# Altium PCB PCB2.PcbDoc
Units mil, origin at the board's own origin, x right, y up, seen from the top; angles counter-clockwise.
Board outline 1340 x 1665 mil, 2 copper layers (Top Layer, Bottom Layer); 15 components, 13 nets, 59 pads, 4 vias.
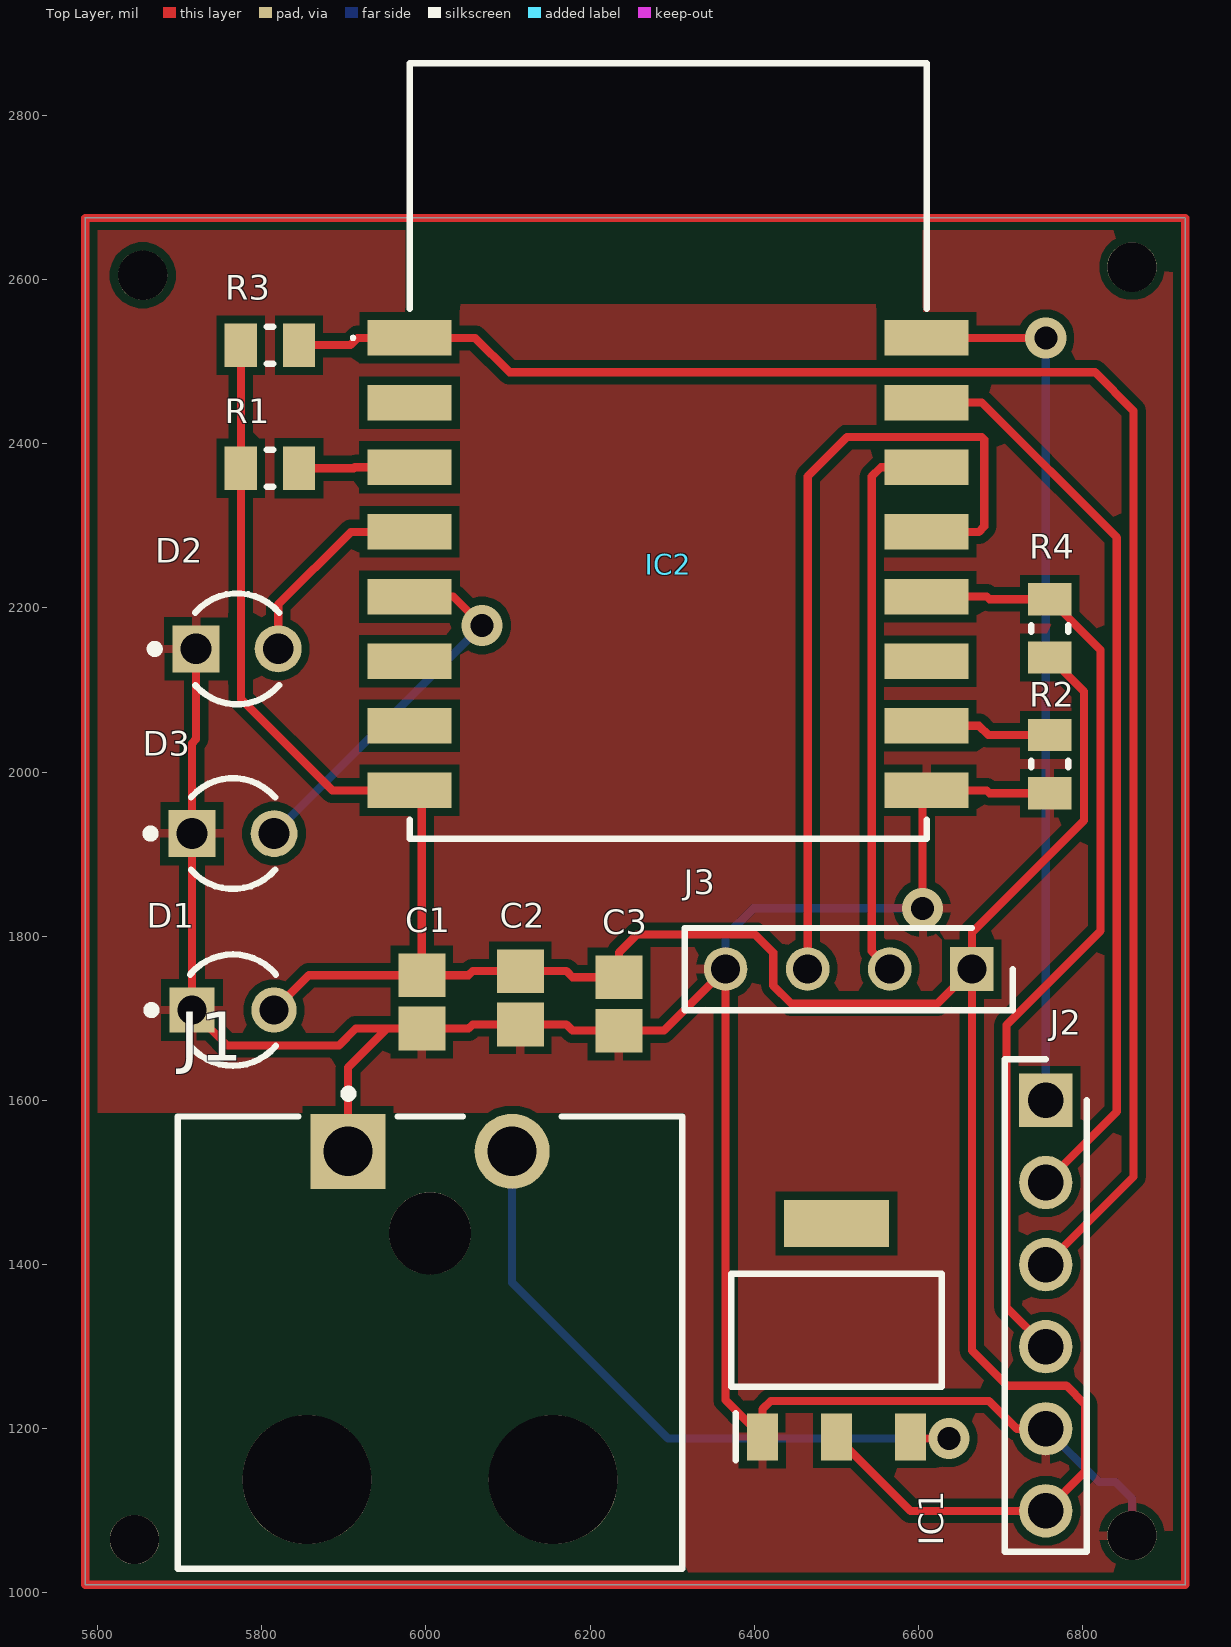
[diagram p0: Top Layer view]
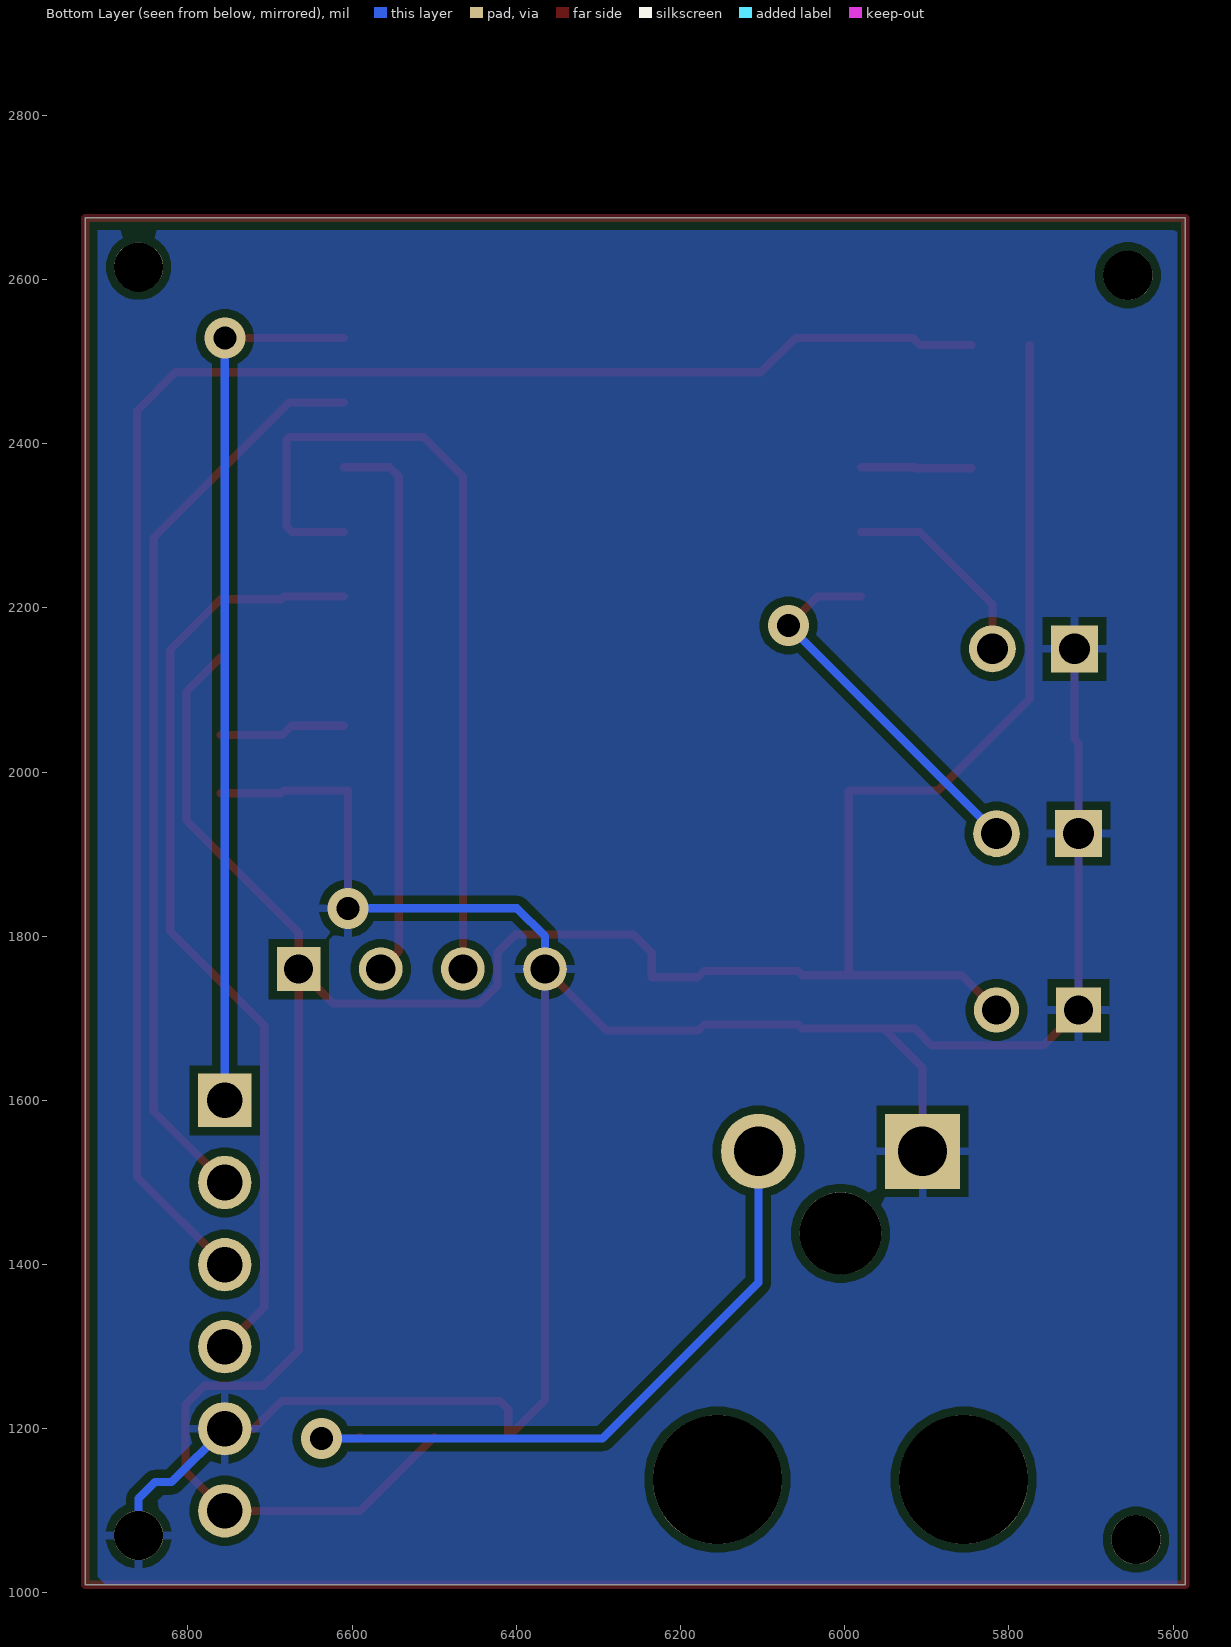
[diagram p1: Bottom Layer view, seen from below]
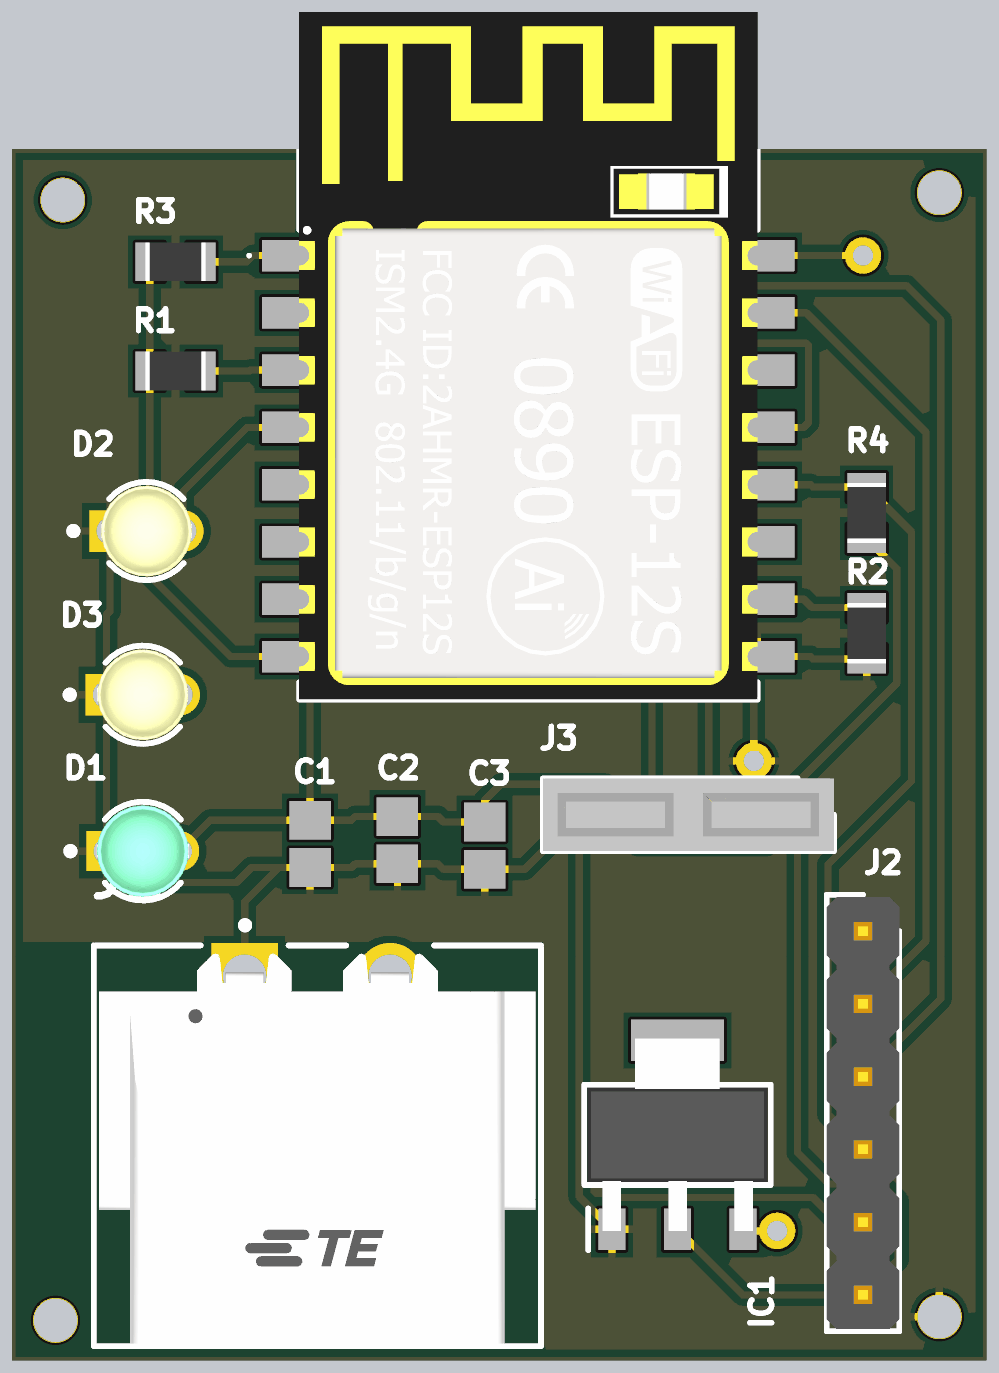
[diagram p2: 3D render of the assembled board from above, using the file's embedded part models]

## Layer stack, top to bottom
Top Solder: solder mask 0.4, Solder Resist, Dk 3.5
Top Layer: signal copper 1.4
Dielectric 1: dielectric 12.6, FR-4, Dk 4.8
Bottom Layer: signal copper 1.4
Bottom Solder: solder mask 0.4, Solder Resist, Dk 3.5

## Board outline
5585,1010 5585,2675 6925,2675 6925,1010

## Design rules (kind name [scope] priority, off if disabled: settings)
Clearance [All] p1: gap=10 ignorepadtopadclearanceinfootprint=FALSE
PolygonConnect [All] p1: connectstyle=Relief reliefconductorwidth=10 reliefentries=4 polygonreliefangle="90 Angle" airgapwidth=10
RoutingVias [All] p1: holewidth=28 width=50 viastyle="Through Hole" minholewidth=28 minwidth=50 maxholewidth=28 maxwidth=50
SolderMaskExpansion [All] p1: expansion=4 istentingtop=FALSE
SupplyNets "Schematic Supply Nets" [InNet('GND')] p1: voltage=0.000
Width [All] p1: maxlimit=10 minlimit=10 preferedwidth=10
30 further rules are at their usual default settings.

## Components (designator, comment, footprint, x,y, rotation, side; value= is the part's Value field where it differs from the comment)
C1 "LT05YD105KAT2X" CAPC2013X130X50NL20T25 5995,1720 r90 top
C2 "LT05YD105KAT2X" CAPC2013X130X50NL20T25 6115,1725 r90 top
C3 "LT05YD105KAT2X" CAPC2013X130X50NL20T25 6235,1717.52 r90 top
D1 "WP710A10LGD" FP-WP710A10LGD-MFG 5765,1710 r0 top
D2 "HLMP-1719" FP-HLMP-1719-MFG 5770,2150 r0 top
D3 "HLMP-1719" FP-HLMP-1719-MFG 5765,1925 r0 top
IC1 "AMS1117-3.3" SOT229P700X180-4N 6500,1320.08 r90 top
IC2 "ESP-12S" ESP12S 6295.04,2390.91 r0 top
J1 "794120-1" FP-794120-1-MFG 6005,1305 r180 top
J2 "240-004" HDRV6W64P0X254_1X6_1524X254X909P 6755,1600 r90 top
J3 "90147-1104" RHDR4W70P0X254_1X4_1016X244X870P 6665,1760 r180 top
R1 "RC0805FR-0710KL" RESC2013X60X35NL10T20 5810,2370 r0 top
R2 "RC0805FR-0710KL" RESC2013X60X35NL10T20 6760,2009.57 r90 top
R3 "RC0805FR-0710KL" RESC2013X60X35NL10T20 5810,2520 r180 top
R4 "RC0805FR-0710KL" RESC2013X60X35NL10T20 6760,2175 r270 top

## Footprints (in the part's own frame and the unit in brackets; to place one, negate y for a bottom-side part, rotate by r counter-clockwise, add the part's x,y. Pads: shape width x height; smd on the part's side, far side on the other; paste and mask are expansions set on the pad)
CAPC2013X130X50NL20T25 [mm] "Chip Capacitor, 2-Leads, Body 2.01x1.25mm, IPC Medium Density"
  rect 1.35x1.45 smd: 1(-0.825,0) 2(0.825,0)
  body extent -1.1,-0.72 1.11,0.72, height 1.3
ESP12S [mm]
  rect 2.6x1.1 smd: 1(-8,3.5) 2(-8,1.5) 3(-8,-0.5) 4(-8,-2.5) 5(-8,-4.5) 6(-8,-6.5) 7(-8,-8.5) 8(-8,-10.5) 9(8,-10.5) 10(8,-8.5) 11(8,-6.5) 12(8,-4.5) 13(8,-2.5) 14(8,-0.5) 15(8,1.5) 16(8,3.5)
  silkscreen extent -9.8,-12 8,12, body extent -8,-12 8,12, height 3.13
FP-794120-1-MFG [mm]
  rect 2.32x2.32 hole 1.52 paste-2539.97 mask+0: 1(2.54,-5.919)
  round 2.32 hole 1.52 paste-2539.97 mask+0: 2(-2.54,-5.919)
  round 3.99 hole 3.99 unplated paste-2539.97 mask+0: ""(-3.81,4.241) ""(3.81,4.241)
  round 2.54 hole 2.54 unplated paste-2539.97 mask+0: ""(0,-3.379)
  silkscreen extent -7.81,-7.82 7.81,7, body extent -7.62,-6.71 7.62,7.16, height 9.14
FP-HLMP-1719-MFG [mm]
  rect 1.45x1.45 hole 0.95 paste-2539.97 mask+0: 1(-1.27,0)
  round 1.45 hole 0.95 paste-2539.97 mask+0: 2(1.27,0)
  silkscreen extent -2.67,-1.71 1.3,1.71, body extent -2.22,-2.22 2.22,2.22, height 0.25
FP-WP710A10LGD-MFG [mm]
  rect 1.4x1.4 hole 0.9 paste-2539.97 mask+0: 1(-1.27,0)
  round 1.4 hole 0.9 paste-2539.97 mask+0: 2(1.27,0)
  silkscreen extent -2.65,-1.73 1.33,1.73, body extent -2.19,-2.19 2.19,2.19, height 0.25
HDRV6W64P0X254_1X6_1524X254X909P [mm]
  rect 1.65x1.65 hole 1.1: 1(0,0)
  round 1.65 hole 1.1: 2(-2.54,0) 3(-5.08,0) 4(-7.62,0) 5(-10.16,0) 6(-12.7,0)
  silkscreen extent -13.97,-1.27 1.27,1.27, body extent -13.9,-1.27 1.2,1.27, height 8.85
RESC2013X60X35NL10T20 [mm] "Chip Resistor, 2-Leads, Body 2.1x1.35mm, IPC Medium Density"
  rect 1x1.35 smd: 1(-0.9,0) 2(0.9,0)
  silkscreen extent -0.1,-0.58 0.1,0.58, body extent -1.05,-0.68 1.05,0.67, height 0.6
RHDR4W70P0X254_1X4_1016X244X870P [mm]
  rect 1.35x1.35 hole 0.9: 1(0,0)
  round 1.35 hole 0.9: 2(2.54,0) 3(5.08,0) 4(7.62,0)
  silkscreen extent -1.27,-1.27 8.89,1.27, body extent -1.27,-1.27 8.89,1.27, height 8.55
SOT229P700X180-4N [mm]
  rect 1.45x0.95 smd: 1(-3.3,2.29) 2(-3.3,0) 3(-3.3,-2.29)
  rect 1.45x3.25 smd: 4(3.3,0)
  silkscreen extent -4.03,-3.25 1.75,3.25, body extent -3.35,-3.15 3.35,3.15, height 1.8

## Part data
C1 C2 C3: library part CMP-2007-04819-1, Manufacturer="AVX Interconnect / Elco", Part Number=LT05YD105KAT2X
D1: library part CMP-00682-20090258-1, "WP710A10LGD LED Thru-Hole PCB Green T-1 3mm Green Lens 2 mA 568 nm 2 mcd Round", Case/Package=Radial, Color=Green, Forward Current=2mA, Forward Voltage=1.9V, Max Junction Temperature (Tj)=110°C, Max Operating Temperature=85°C, Min Operating Temperature=-40°C, Power Dissipation=62.5mW, Reverse Voltage=5V, Dominant Wavelength=568nm, Height=4.6mm, Illumination Color=Green, Lead Free="Lead Free", Lens Color=Green, Lens Style="Diffused, Dome, Round, Tinted", Luminous Intensity=2mcd, Mount="Through Hole", NexarPartId=20090258, Number of LEDs=1, Number of Pins=3, Power Rating=62.5mW, RoHS=Compliant, Schedule B="8541402000, 8541402000", Test Current=2mA, Viewing Angle=40°, Wavelength=568nm
D2 D3: library part CMP-2000-06410-2, "LED YELLOW DIFFUSED T-1 T/H", Colour=Yellow, Forward Current=2mA, Forward Voltage=1.8V, Manufacturer=Broadcom, Package=0, Power Dissipation=17.5mW, Reverse Voltage=5V, Temperature="-40°C to +100°C", Temperature Range High=+100°C, Temperature Range Low=-40°C, Automotive=No, Category=Diode, ComponentLink2Description=Datasheet, ComponentLink2URL=https://docs.broadcom.com/docs/AV02-1557EN, Device Class L1=Optoelectronics, Device Class L2=LEDs, Device Class L3=unset, Digikey Description="LED YELLOW DIFFUSED T-1 T/H", Lead Free=Yes, Led Orientation=Straight, Luminous Intensity=2.1mcd, Manufacturer Part Number=HLMP-1719, Mouser Description="Standard LEDs - Through Hole Yellow Diffused 585nm 2.1mcd", Octopart=https://octopart.com/hlmp-1719-broadcom-71130405, RoHS=TRUE, Viewing Angle=50°, Wavelength=585nm
IC1: "Integrated Circuit", Manufacturer_Name=Advanced, Datasheet Link=https://datasheet.datasheetarchive.com/originals/distributors/Datasheets-28/DSA-550594.pdf, Height=1.8mm, Manufacturer_Part_Number=AMS1117-3.3
IC2: "Integrated Circuit", Manufacturer_Name="RF SOLUTIONS", Mouser Part Number=223-ESP-12S, Datasheet Link=https://www.rfsolutions.co.uk/downloads/6253e9e3cab0d503DS-ESP12S-1.pdf, Height=3mm, Manufacturer_Part_Number=ESP-12S, Mouser Price/Stock=https://www.mouser.co.uk/ProductDetail/RF-Solutions/ESP-12S?qs=UkDUCjYnTB27YArJ5wHUxg%3D%3D
J1: library part CMP-03790-39534315-1, "794120-1 Power Connector, 2 Contact(s), Male, Solder Terminal, Receptacle", Color=Natural, Contact Current Rating=12A, Flammability Rating="UL94 V-2", Manufacturer Lifecycle Status=ACTIVE, Max Operating Temperature=105°C, Max Voltage Rating (AC)=250V, Max Voltage Rating (DC)=250.25kV, Min Operating Temperature=-67°C, Number of Power Positions=2, Approvals=CSA, Circuit Application=Power, Connector System=Wire-to-Board, Connector Type=Pin, Contact Gender=Male, Contact Material="Bronze, Tin", Contact Plating=Tin, Contact Retention=Without, Contact Style=Pin, Current Rating=12A, ELV=Compliant, Fastening Type=Ramp, Height=9.14mm, Housing Color=Natural, Housing Material=Nylon, Lead Free="Lead Free", Lead Pitch=5.08mm, Length=15.24mm, Lifecycle Status=Production, Material=Nylon, Mount="Through Hole", NexarPartId=39534315, Number Of Circuits=2, Number of Contacts=2, Number of Pins=2, Number of Ports=1, Number of Positions=2, Number of Rows=1, Number of Terminals=2, Operating Supply Voltage=250V, Orientation="Right Angle", PCB Mounting Orientation="Right Angle", Pitch=5.08mm, Radiation Hardening=No, REACH SVHC=Unknown, RoHS=Compliant, Sealable=No, Termination=Solder, VDE Tested=No, Voltage Rating=250V, Voltage Rating (AC)=250V, Width=12.3mm
J2: "Connector", Manufacturer_Name=Digilent, Arrow Part Number=240-004, Arrow Price/Stock=https://www.arrow.com/en/products/240-004/digilent?region=nac, Datasheet Link=https://digilent.com/reference/_media/reference/test-and-measurement/6-pin-header-gender-changer/163-068-2.pdf, Height=9.09mm, Manufacturer_Part_Number=240-004
J3: "Connector", Manufacturer_Name=Molex, Mouser Part Number=538-90147-1104, Height=8.7mm, Manufacturer_Part_Number=90147-1104, Mouser Price/Stock=https://www.mouser.co.uk/ProductDetail/Molex/90147-1104?qs=QESXi79X%252BKpRACDRmfEx7Q%3D%3D
R1 R2 R3 R4: library part CMP-1659-00013-4, "Chip Resistor, 10 KOhm, +/- 1%, 0.125 W, -55 to 155 degC, 0805 (2012 Metric), RoHS, Tape and Reel", Manufacturer=Yageo, Max Operating Temperature="155 degC", Min Operating Temperature="-55 degC", Package Quantity=5000, Voltage Rating="150 V", ComponentLink1Description="Manufacturer URL", ComponentLink1URL=http://www.yageo.com/, ComponentLink2Description=Datasheet, ComponentLink2URL=http://www.yageo.com/documents/recent/PYu-RC_Group_51_RoHS_L_04.pdf, DatasheetVersion="Rev. 4, 02/2016", Height="0.5 mm", Length="2 mm", Mount="Surface Mount", Mounting Technology="Surface Mount", PackageDescription="2-Pin Surface Mounted Device, Body 2 x 1.25 mm", PackageReference=0805, Packaging="Tape and Reel", Pins=2, REACH SVHC="No SVHC", RoHSCompliant=true

## Free pads (board coordinates)
  round 60 hole 60: 4(5645,1065) 5(6860,1070) 6(5655,2605) 7(6860,2615)

## Via types
v1: diameter 50, hole 28, Top Layer to Bottom Layer, 4 vias

## Nets (pads, with @x,y where several pads share a name; then routed paths per layer and width w, separated by ;. In a path a pad name is that pad's centre, name@x,y a point inside that pad or via, vN(x,y) a via of type N, cw(c..) or ccw(c..) an arc to the next point about the centre after c; other vN are vias at no path point)
detect: D2.2 IC2.4 | length 250.7
  Top Layer w10: D2.2 5820,2204 5908.48,2292.48 IC2.4
Echo: IC2.13 J3.3 | length 1014.8
  Top Layer w10: J3.3 6465,2360 6513,2408 6677,2408 6680,2405 6680,2299 6673.48,2292.48 IC2.13
GND: C1.1 C2.1 C3.1 D1.1 D2.1 D3.1 IC1.1 IC2.9 J1.1 J2.5 J3.4 pad.5 R2.1 | length 3088.5
  Top Layer w10: D2.1 5720,2040 5715,2035 D3.1 D1.1 5758,1667 5894,1667 5914.52,1687.52 5952.52,1687.52 ; J1.1 5905,1640 5952.52,1687.52 ; v1(6605,1834) 6605,1977.52 IC2.9 6683,1977.52 6686.39,1974.13 R2.1 ; J2.5 6720.04,1200 6686.04,1234 6420,1234 6409.84,1223.84 IC1.1 6365,1235 J3.4 6290.04,1685.04 C3.1 6178.48,1685.04 6171,1692.52 C2.1 6057,1692.52 6052,1687.52 C1.1 5952.52,1687.52
  Bottom Layer w10: J3.4 6365,1800 6399,1834 v1(6605,1834) ; J2.5 6820,1135 6840,1135 6860,1115 pad.5
IO0: IC2.12 J2.4 R4.1 | length 1154.7
  Top Layer w10: IC2.12 6683,2213.74 6686.31,2210.43 R4.1 6821.58,2148.86 6821.58,1806.58 6707,1692 6707,1348 J2.4
NetIC1_3: IC1.3 J1.2 | length 819.7
  Top Layer w10: IC1.3 6590.16,1188 v1(6637,1188)
  Bottom Layer w10: J1.2 6105,1378 6295,1188 v1(6637,1188)
NetIC2_3: IC2.3 R1.2 | length 135.1
  Top Layer w10: R1.2 5912,2370 5913.22,2371.22 IC2.3
NetIC2_10: IC2.10 R2.2 | length 154.7
  Top Layer w10: IC2.10 6673.74,2056.26 6685,2045 R2.2
RST: IC2.1 J2.3 R3.1 | length 2141.2
  Top Layer w10: R3.1 5908,2520 5916.7,2528.7 IC2.1 6060,2528.7 6101.7,2487 6815,2487 6862,2440 6862,1507 J2.3
RX: IC2.15 J2.2 | length 1121
  Top Layer w10: IC2.15 6677,2449.96 6841.58,2285.38 6841.58,1586.58 J2.2
Trig: IC2.14 J3.2 | length 680.8
  Top Layer w10: J3.2 6543,1782 6543,2360 6554.22,2371.22 IC2.14
TX: IC2.16 J2.1 | length 1073.7
  Top Layer w10: IC2.16 v1(6755,2528.7)
  Bottom Layer w10: J2.1 v1(6755,2528.7)
VCC: C1.2 C2.2 C3.2 D1.2 IC1.2 IC2.8 J2.6 J3.1 R1.1 R3.2 R4.2 | length 3435.1
  Top Layer w10: R3.2 5774.57,2444 R1.1 5774.57,2088.95 5886,1977.52 IC2.8 5995,1977.52 C1.2 ; D1.2 5857.48,1752.48 C1.2 ; IC1.2 6590.16,1100 J2.6 6803,1148 6803,1229.52 6780,1252.52 6708,1252.52 6665,1295.52 J3.1 ; R4.2 6801.58,2097.99 6801.58,1941.02 6665,1804.45 J3.1 ; C1.2 6052,1752.48 6057,1757.48 C2.2 6171,1757.48 6178.48,1750 C3.2 6235,1780 6257,1802 6401,1802 6423,1780 6423,1740 6445,1718 6623,1718 J3.1
wifi: D3.2 IC2.5 | length 461.5
  Top Layer w10: IC2.5 6033.26,2213.74 v1(6068.5,2178.5)
  Bottom Layer w10: D3.2 v1(6068.5,2178.5)
pads on no net: IC1.4 IC2.2 IC2.6 IC2.7 IC2.11 J1.
copper on no net: | length 6010
  Top Layer w10: 5585,1010 6925,1010 6925,2675 5585,2675 5585,1010

## Polygon pours and split planes (outlines as drawn)
GND on Top Layer "GND_L01_P000" (solid, pour order 0): 5585,2675 5585,1590 5590,1585 6315,1585 6315,1035 6310,1030 6330,1010 6925,1010 6925,2675 6920,2680 6605,2680 6605,2570 5975,2570 5975,2675
GND on Bottom Layer "GND_L02_P002" (solid, pour order 2): 5595,2665 5600,2660 6910,2660 6910,1020 6900,1010 5595,1010